# Altium PCB XBeeReceiver.PcbDoc
Units mm, origin at the board's own origin, x right, y up, seen from the top; angles counter-clockwise.
Board outline 65.5 x 54.1 mm, 4 copper layers (Top Copper, GND, PWR, Bottom Copper), stack 1.605 mm thick; 49 components, 51 nets, 211 pads, 164 vias.
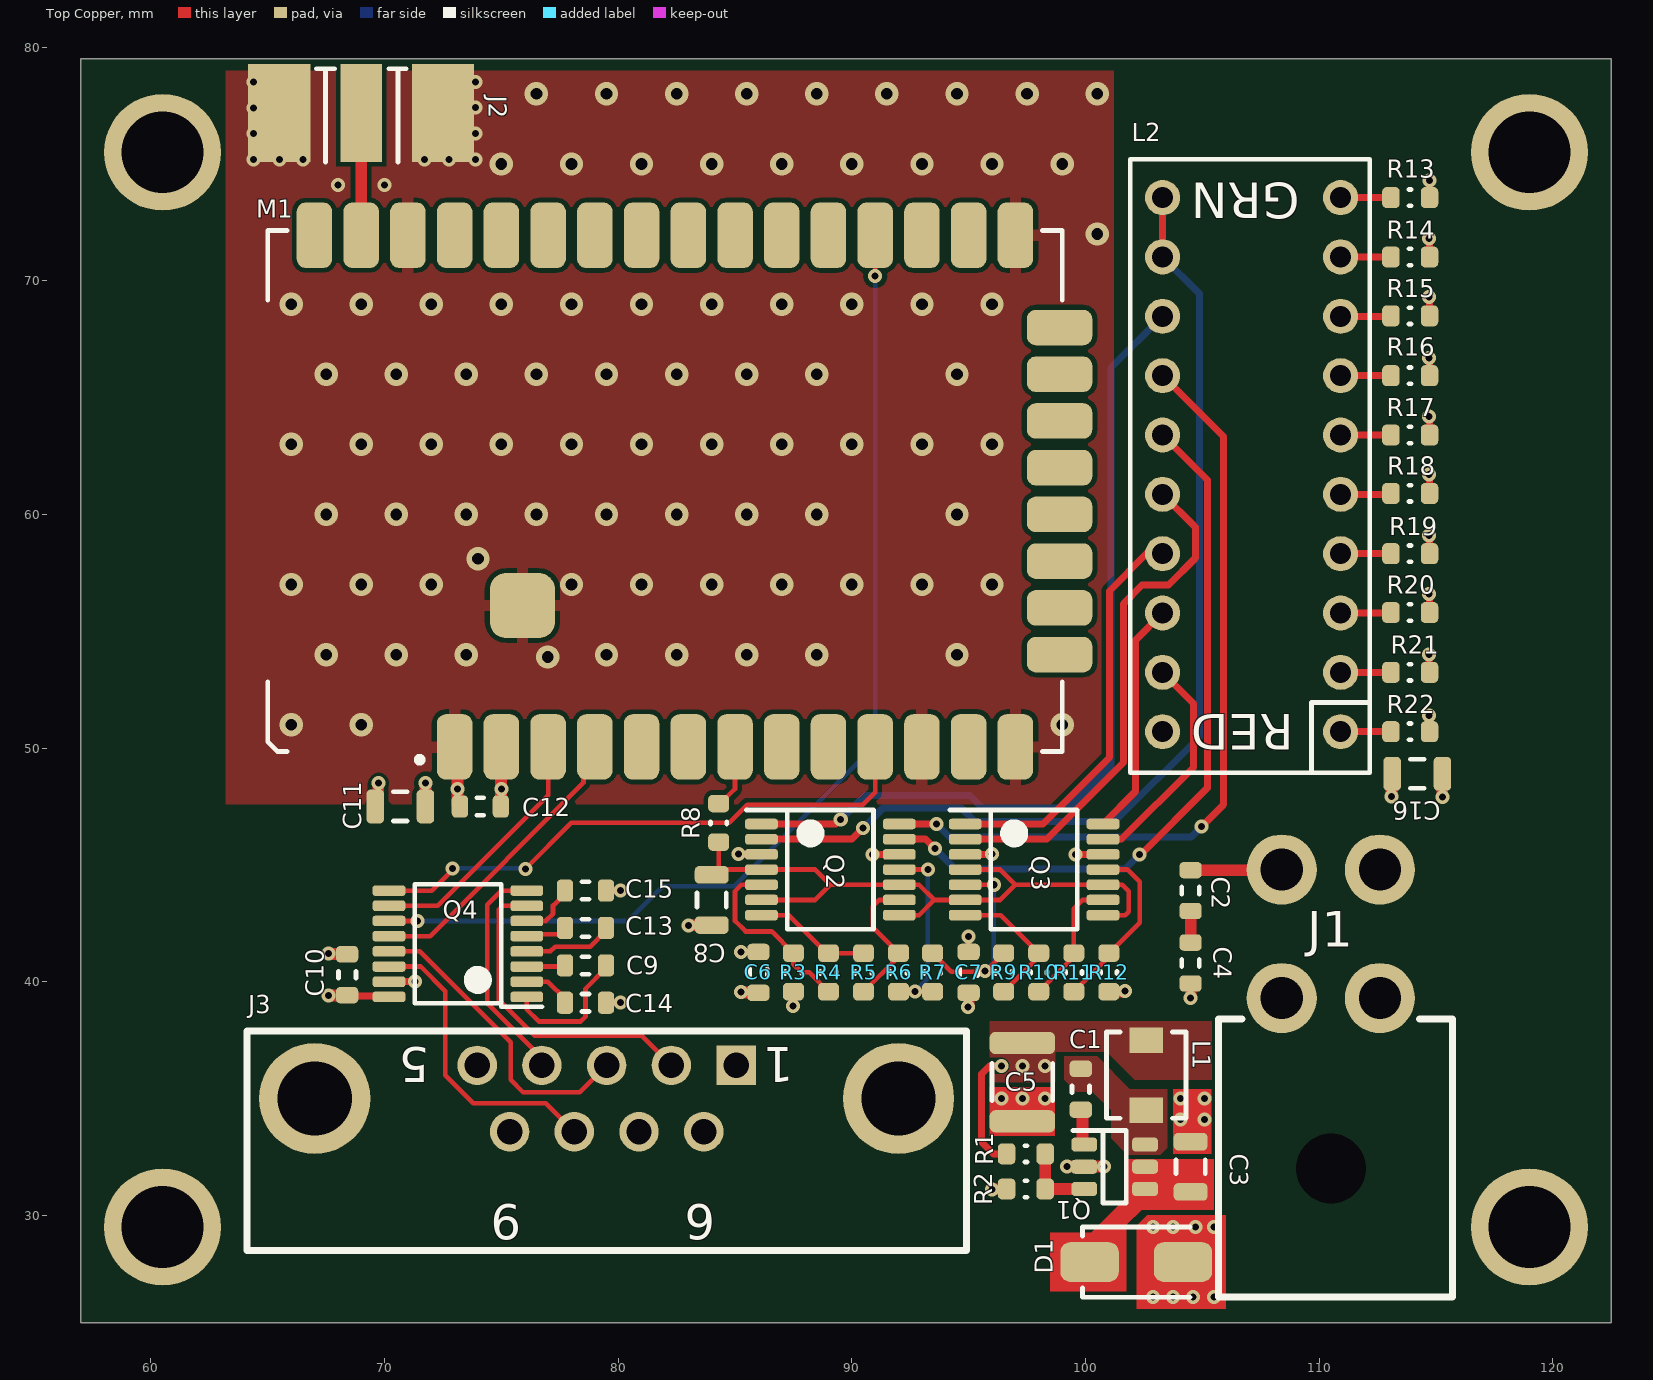
[diagram p0: Top Copper view]
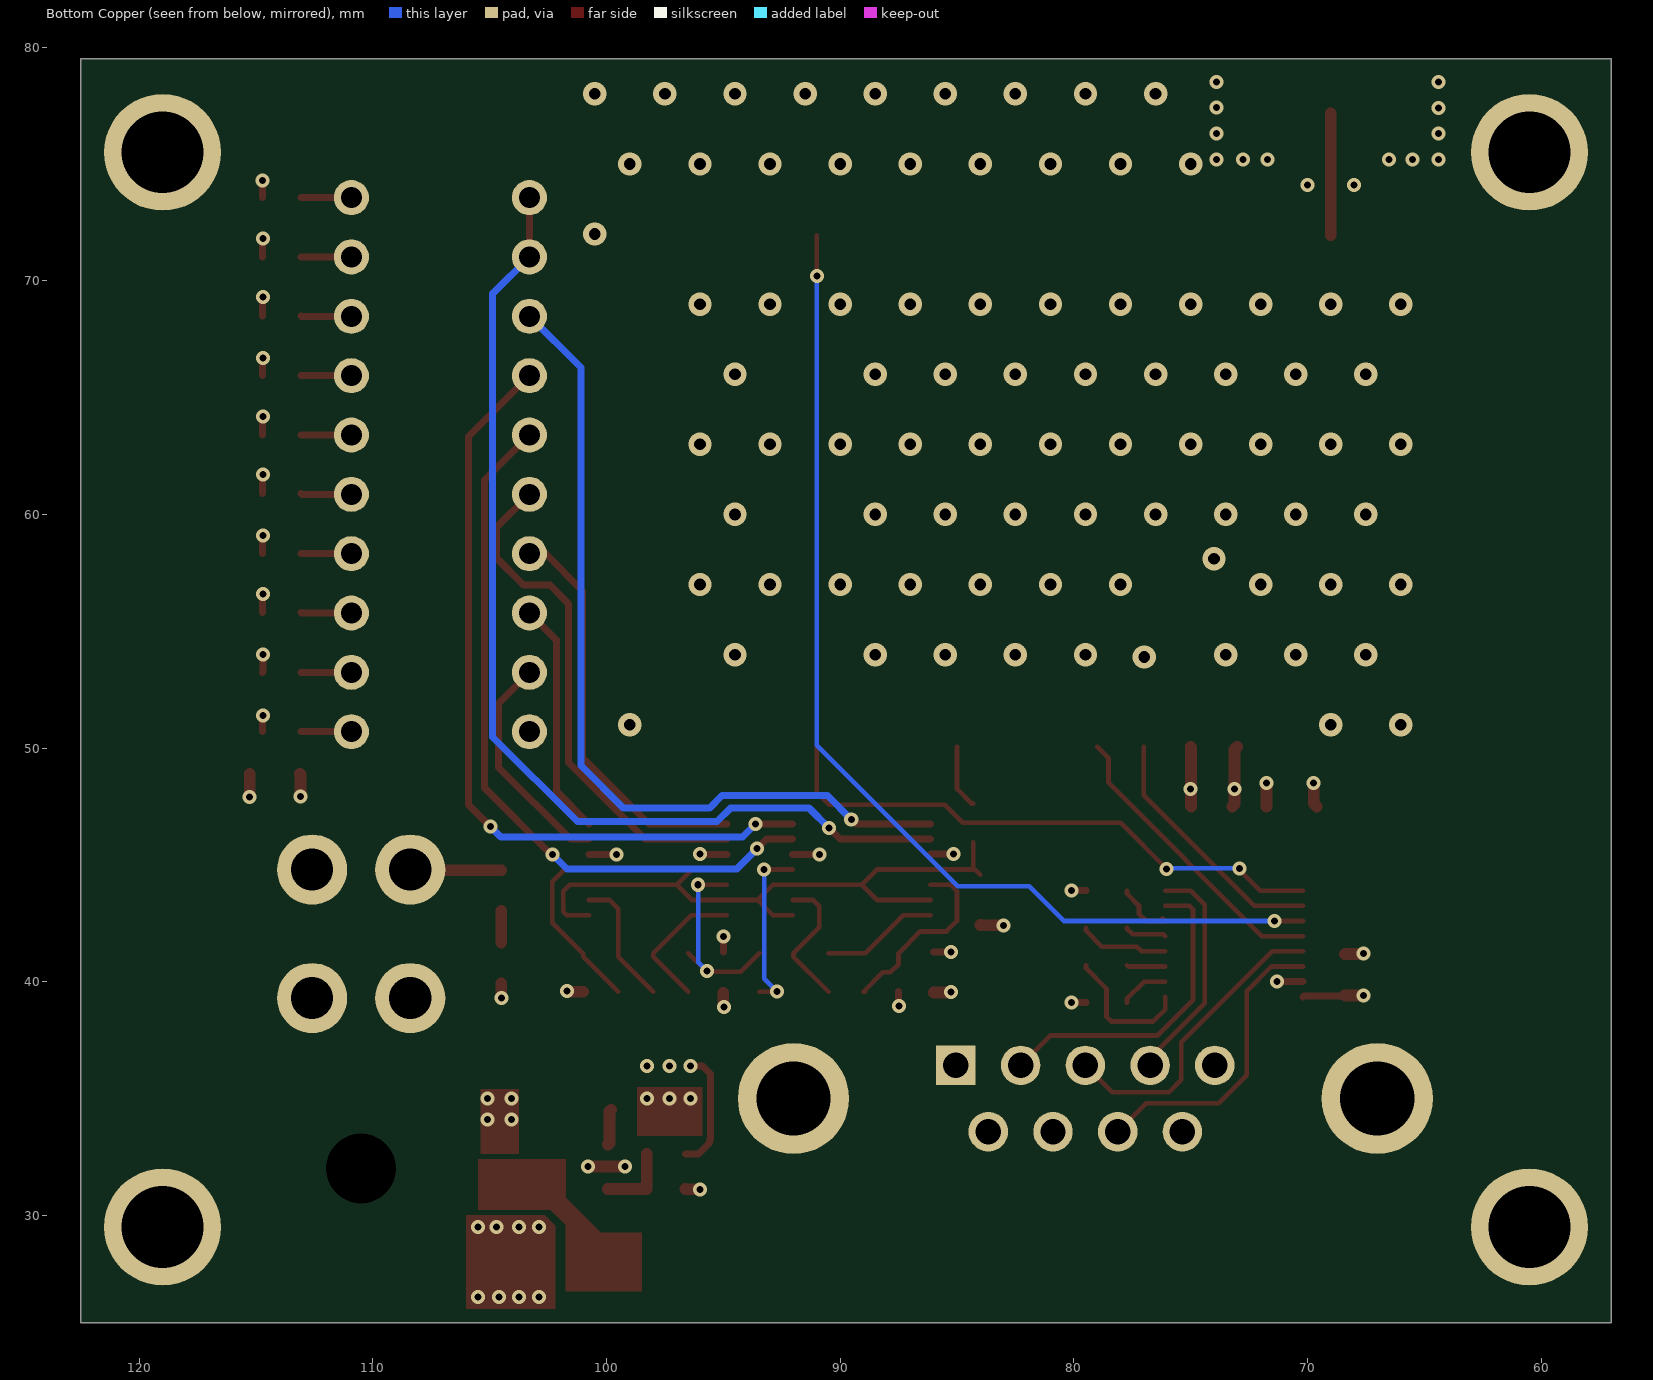
[diagram p1: Bottom Copper view, seen from below]
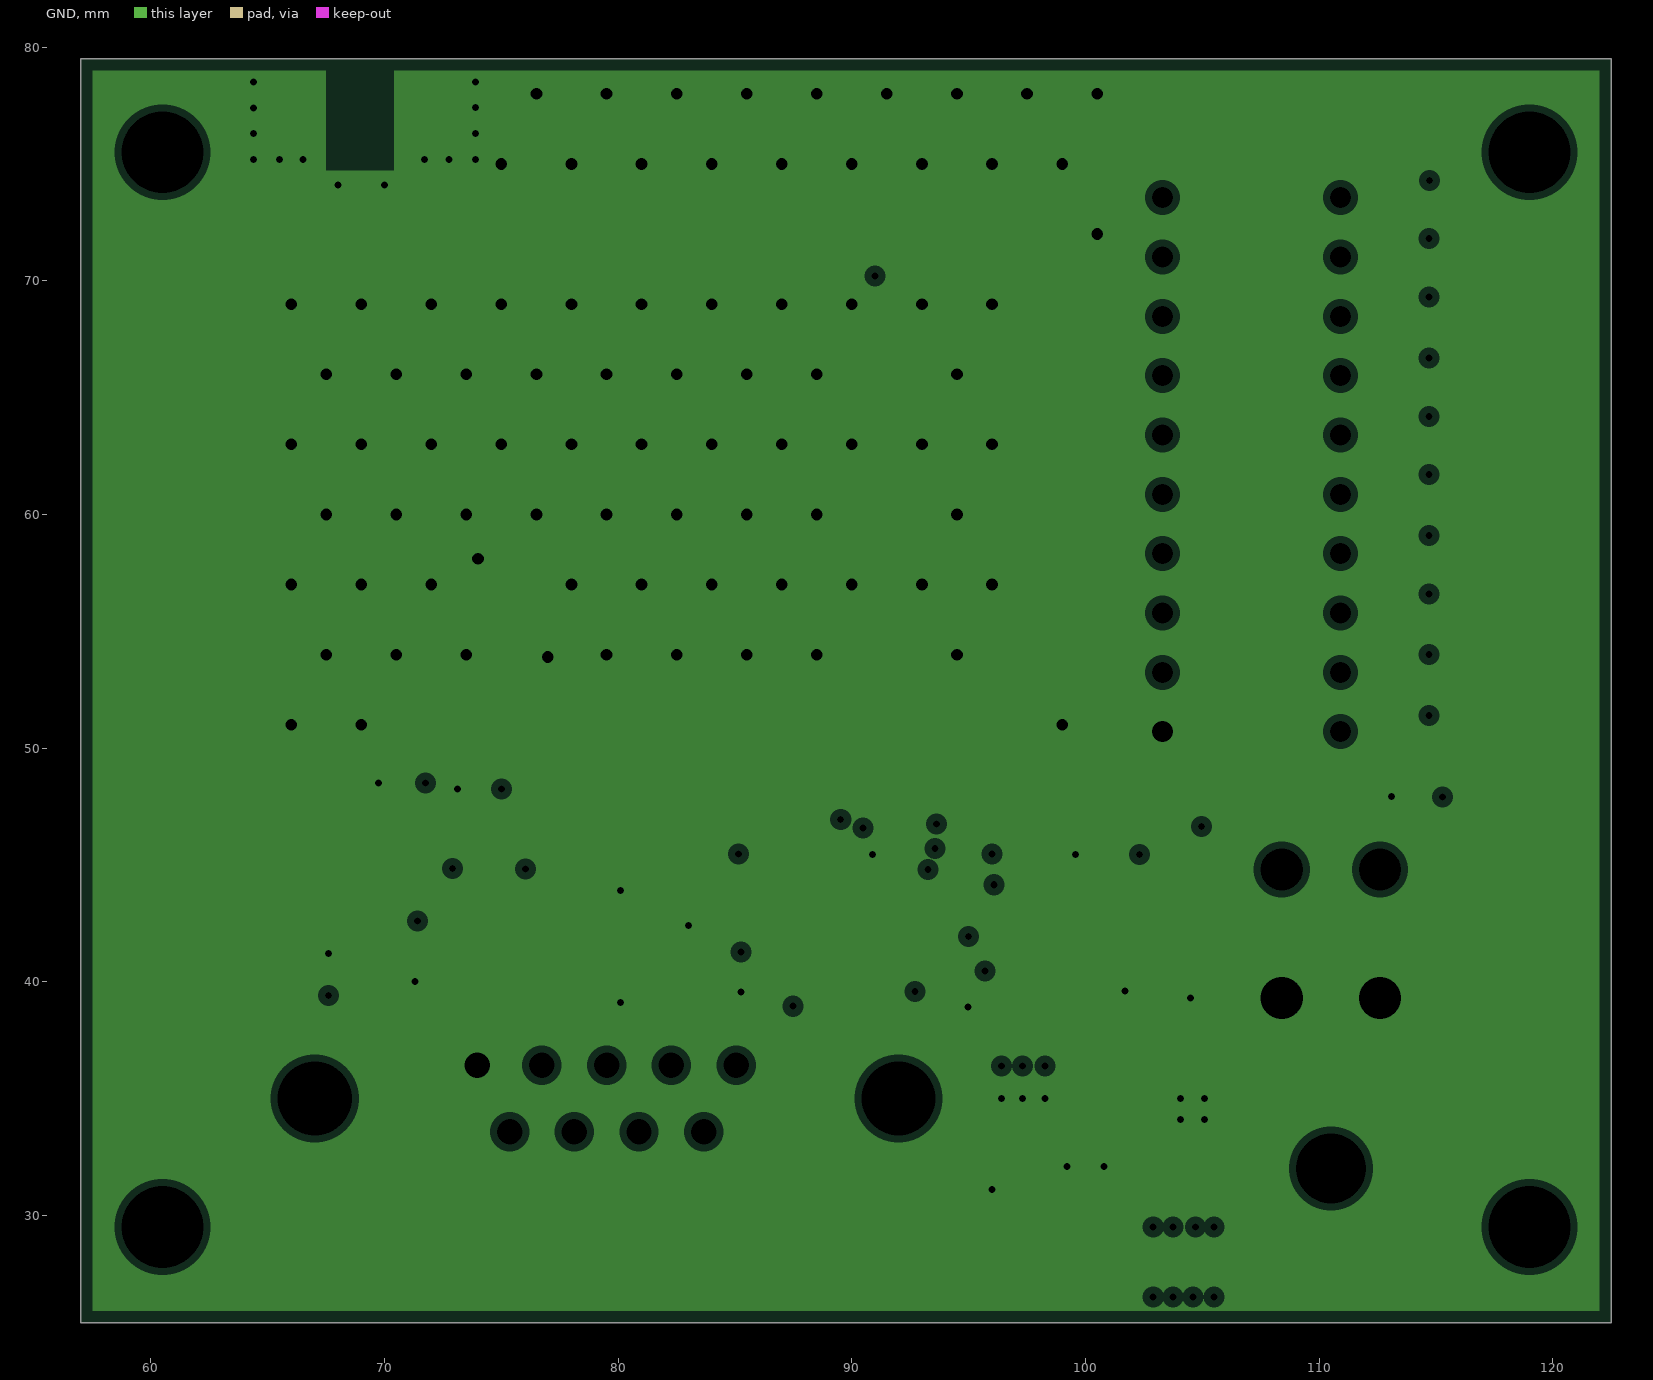
[diagram p2: GND, clearances drawn from the general rule]
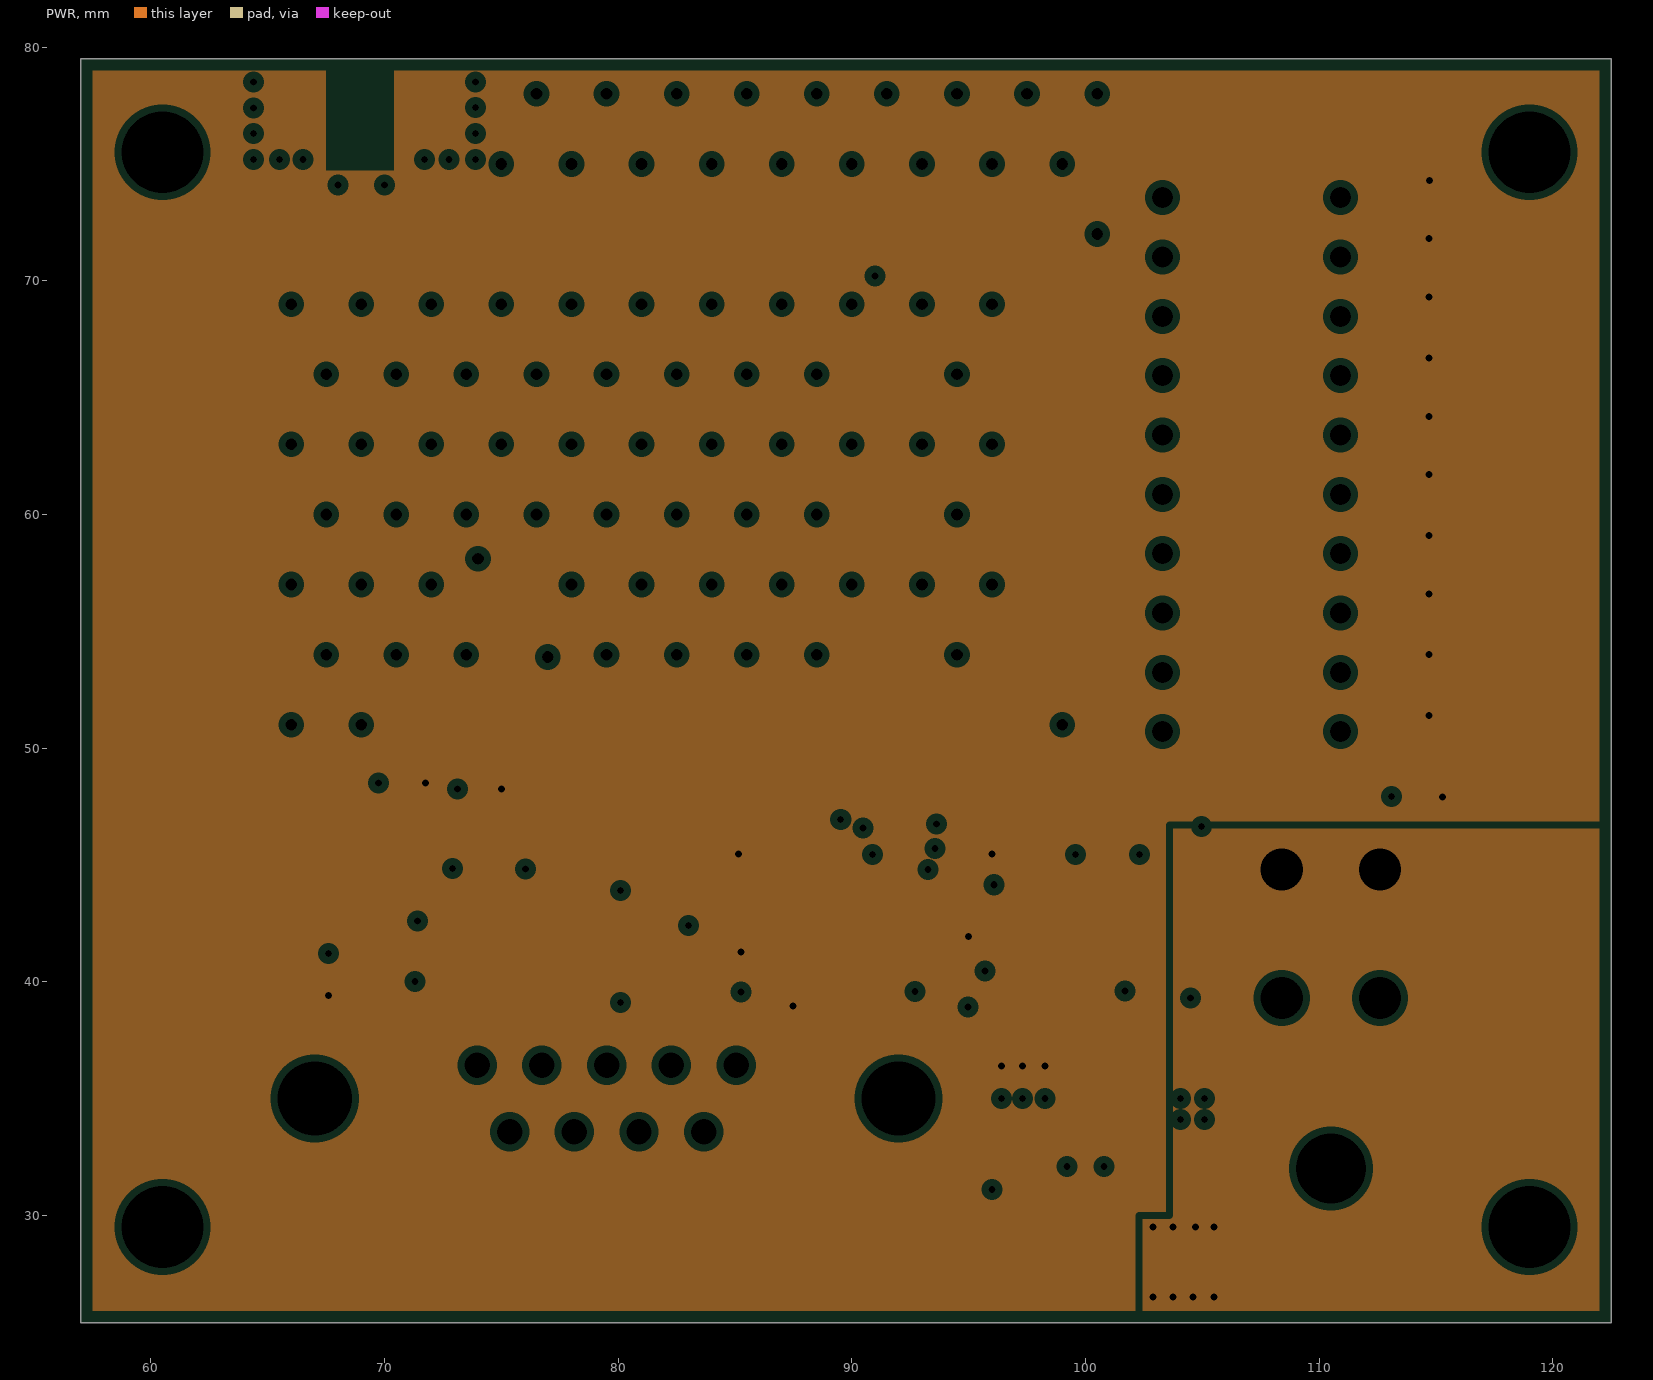
[diagram p3: PWR, clearances drawn from the general rule]
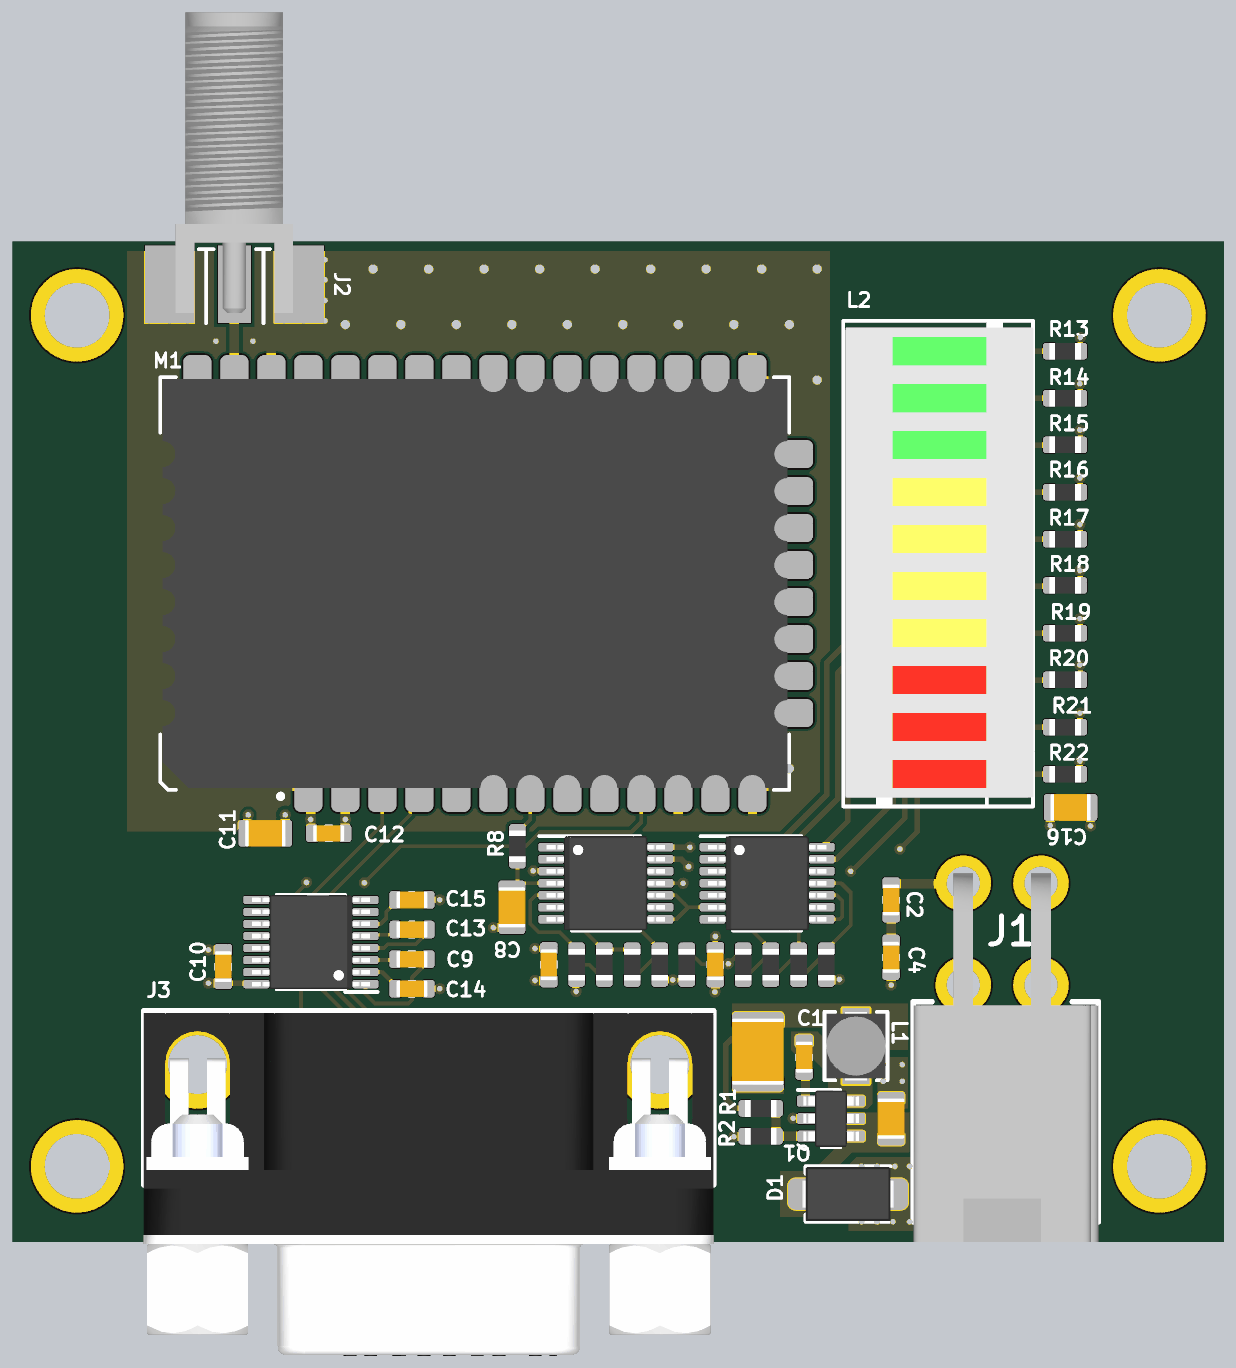
[diagram p4: 3D render of the assembled board from above, using the file's embedded part models]

## Layer stack, top to bottom
Top Mask: solder mask 0.015, Solder Resist, Dk 3.8
Top Copper: signal copper 0.035
Dielectric 1: prepreg 0.2, 7628, Dk 4.6
GND: plane copper 0.035, net GND
Core: core 1.065, FR-4, Dk 4.5
PWR: plane copper 0.035, net +3.3V
Dielectric 2: prepreg 0.2, 7628, Dk 4.6
Bottom Copper: signal copper 0.035
Bottom Mask: solder mask 0.015, Solder Resist, Dk 3.8

## Board outline
57,25.4 57,79.5 122.5,79.5 122.5,25.4

## Design rules (kind name [scope] priority, off if disabled: settings)
BoardOutlineClearance [All] p1: gap=0.2 ignorepadtopadclearanceinfootprint=FALSE except(0.4: Arc-SplitBarrior Arc-SplitContinuation Track-SplitBarrior Track-SplitContinuation SMDPad-SplitBarrior SMDPad-SplitContinuation THPad-SplitBarrior THPad-SplitContinuation Via-SplitBarrior Via-SplitContinuation Fill-SplitBarrior Fill-SplitContinuation Poly-SplitBarrior Poly-SplitContinuation Region-SplitBarrior Region-SplitContinuation Text-SplitBarrior Text-SplitContinuation)
Clearance "Clearance Bottom Layer" [OnLayer('Bottom Layer')] p1: gap=0.203 ignorepadtopadclearanceinfootprint=TRUE except(0.254: Arc-Text Track-Text SMDPad-Text THPad-Text Via-Text Fill-Text Poly-Text Region-Text Text-Text)
Clearance "Clearance Top Layer" [OnLayer('Top Layer')] p2: gap=0.203 ignorepadtopadclearanceinfootprint=TRUE except(0.254: Arc-Text Track-Text SMDPad-Text THPad-Text Via-Text Fill-Text Poly-Text Region-Text Text-Text)
Clearance [All] p3: gap=0.2 ignorepadtopadclearanceinfootprint=FALSE except(0.089: Arc-Arc Arc-Track Arc-SMDPad Track-Track Track-SMDPad SMDPad-SMDPad; 0.127: Arc-Via Track-Via SMDPad-Via THPad-Via Via-Via; 0.254: Arc-Text Track-Text SMDPad-Text THPad-Text Via-Text Fill-Text Poly-Text Region-Text Text-Text)
HoleSize [All] p1: absolutevalues=TRUE maxlimit=6.3 minlimit=0.2 maxpercent=80.000 minpercent=20.000
MinimumAnnularRing [All] p1: minimumring=0.076
MinimumSolderMaskSliver [All] p1: minsoldermaskwidth=0.051
PlaneClearance [All] p1: clearance=0.3
PlaneConnect [All] p1: planeconnectstyle=Direct reliefexpansion=0.508 reliefentries=4 reliefconductorwidth=0.254 reliefairgap=0.254
PolygonConnect PolygonConnectXbee [All vs HasFootprint('XBEESX868MOD')] p1: thpad.connectstyle=Direct thpad.reliefconductorwidth=0.254 thpad.reliefentries=4 thpad.polygonreliefangle="90 Angle" thpad.airgapwidth=0.254 smdpad.connectstyle=Relief smdpad.reliefconductorwidth=0.5 smdpad.reliefentries=4 smdpad.polygonreliefangle="90 Angle" smdpad.airgapwidth=0.2 via.connectstyle=Direct via.reliefconductorwidth=0.254 via.reliefentries=4 via.polygonreliefangle="90 Angle" via.airgapwidth=0.254
PolygonConnect PolygonConnect_1 [All] p2: connectstyle=Direct reliefconductorwidth=0.508 reliefentries=4 polygonreliefangle="90 Angle" airgapwidth=0.254
RoomDefinition U_XbeeModule [InComponentClass('U_XbeeModule')] p1: confinementstyle=ConfineIn formatcopy=TRUE lockcomponents=FALSE outline 63.7,18.9 100.7,18.9 100.7,92.1 63.7,92.1
RoomDefinition U_RSSI [InComponentClass('U_RSSI')] p2: confinementstyle=ConfineIn formatcopy=TRUE lockcomponents=FALSE outline 82.7,38.6 116.2,38.6 116.2,75.6 82.7,75.6
RoomDefinition U_PowerSupply [InComponentClass('U_PowerSupply')] p3: confinementstyle=ConfineIn formatcopy=TRUE lockcomponents=FALSE outline 95.3,25.9 105.8,25.9 105.8,45.7 95.3,45.7
RoomDefinition Main [InComponentClass('Main')] p4: confinementstyle=ConfineIn formatcopy=TRUE lockcomponents=FALSE outline 104.996,24.796 104.996,47.104 116.404,47.104 116.404,24.796
RoutingCorners [All] p1: cornerstyle=Round minsetback=2.54 maxsetback=2.54
RoutingVias [All] p1: holewidth=0.5 width=1 viastyle="Through Hole" minholewidth=0.2 minwidth=0.45 maxholewidth=1 maxwidth=2
SilkToSilkClearance [All] p1: silktosilkclearance=0.1
SilkToSolderMaskClearance [IsPad] p1: minsilkscreentomaskgap=0.1 clearancetoexposedcopper=TRUE
SolderMaskExpansion [All] p1: expansion=0.102
Width [All] p1: maxlimit=2.54 minlimit=0.089 preferedwidth=0.381
23 further rules are at their usual default settings.

## Classes and differential pairs
component class U_XbeeModule: C9 C10 C11 C12 C13 C14 C15 J2 J3 M1 Q4
component class U_RSSI: C6 C7 C8 C16 L2 Q2 Q3 R3 R4 R5 R6 R7 R8 R9 R10 R11 R12 R13 R14 R15 R16 R17 R18 R19 R20 R21 R22
component class U_PowerSupply: C1 C2 C3 C4 C5 D1 g L1 Q1 R1 R2
component class Main: J1

## Components (designator, comment, footprint, x,y, rotation, side; value= is the part's Value field where it differs from the comment)
C1 "CGA3E2X7R1H104K080AA" CAPC1608X08N 99.8,35.4 r270 top value=100nF
C2 "CGA3E2X7R1H104K080AA" CAPC1608X08N 104.5,43.9 r90 top value=100nF
C3 "CGA4J3X5R1H475K125AB" CAPC2012X14N 104.5,32.08 r270 top value=4.7uF
C4 "CGA3E2X7R1H104K080AA" CAPC1608X08N 104.5,40.8 r90 top value=100nF
C5 "CGA6P1X7R1C226M250AC" CAPC3225X28N 97.3,35.7 r90 top value=22uF
C6 "CGA3E2X7R1H104K080AA" CAPC1608X08N 86,40.4 r90 top value=100nF
C7 "CGA3E2X7R1H104K080AA" CAPC1608X08N 95,40.4 r90 top value=100nF
C8 "CGA4J3X5R1H475K125AB" CAPC2012X14N 84,43.5 r90 top value=4.7uF
C9 "CGA3E2X7R1H104K080AA" CAPC1608X08N 78.6,40.7 r180 top value=100nF
C10 "CGA3E2X7R1H104K080AA" CAPC1608X08N 68.4,40.3 r90 top value=100nF
C11 "CGA4J3X5R1H475K125AB" CAPC2012X14N 70.675,47.5 r0 top value=4.7uF
C12 "CGA3E2X7R1H104K080AA" CAPC1608X08N 74.1,47.5 r180 top value=100nF
C13 "CGA3E2X7R1H104K080AA" CAPC1608X08N 78.6,42.3 r180 top value=100nF
C14 "CGA3E2X7R1H104K080AA" CAPC1608X08N 78.6,39.1 r0 top value=100nF
C15 "CGA3E2X7R1H104K080AA" CAPC1608X08N 78.6,43.9 r0 top value=100nF
C16 "CGA4J3X5R1H475K125AB" CAPC2012X14N 114.2,48.9 r0 top value=4.7uF
D1 "B340A-13-F" DIOM4326X24N 102.175,28 r0 top value=3A/40V
J1 "3930-1041" MOLEX-3930-1041 108.4,39.3 r0 top
J2 "73251-2120" MOLEX-SMA-PCB 64.175,79.275 r0 top
J3 "DB9 - 2311765-2" DB9F-PCB-TH 79.505,25.5 r180 top
L1 "SRP3020TA-6R8M" INDP3532X20N 102.6,36 r90 top value=6.8uH
L2 "HDSP-4832" HDSP-4832 110.92,50.7 r180 top
M1 "XB8X-DMRS-001" XBEESX868MOD 82,61 r90 top
Q1 "TPS560430YFQDBVRQ1" SOT95P280X110-6N 101.25,32.08 r0 top
Q2 "TLV1704AQPWRQ1" TSOP65P640X120-14N 89.08,44.8 r0 top
Q3 "TLV1704AQPWRQ1" TSOP65P640X120-14N 97.8,44.8 r0 top
Q4 "TRS3232EQPWRQ1" TSOP65P640X120-16N 73.14,41.625 r180 top
R1 "ERJ-3EKF5102V" RESC1608X04N 97.45,32.63 r180 top value=51K
R2 "ERJ-3EKF2212V" RESC1608X04N 97.45,31.13 r0 top value=22.1K
R3 "ERJ-3EKF2212V" RESC1608X04N 87.5,40.4 r270 top value=22.1K
R4 "ERJ-3EKF2212V" RESC1608X04N 89,40.4 r270 top value=22.1K
R5 "ERJ-3EKF2212V" RESC1608X04N 90.5,40.4 r90 top value=22.1K
R6 "ERJ-3EKF2212V" RESC1608X04N 92,40.4 r90 top value=22.1K
R7 "ERJ-3EKF2212V" RESC1608X04N 93.455,40.4 r270 top value=22.1K
R8 "ERJ-3EKF5102V" RESC1608X04N 84.3,46.8 r90 top value=51K
R9 "ERJ-3EKF2212V" RESC1608X04N 96.5,40.4 r90 top value=22.1K
R10 "ERJ-3EKF2212V" RESC1608X04N 98,40.4 r90 top value=22.1K
R11 "ERJ-3EKF2212V" RESC1608X04N 99.5,40.4 r90 top value=22.1K
R12 "ERJ-3EKF2212V" RESC1608X04N 101,40.4 r90 top value=22.1K
R13 "ERJ-3EKF1000V" RESC1608X04N 113.9,73.56 r0 top value=100R
R14 "ERJ-3EKF1000V" RESC1608X04N 113.9,71.02 r0 top value=100R
R15 "ERJ-3EKF1000V" RESC1608X04N 113.9,68.5 r0 top value=100R
R16 "ERJ-3EKF1000V" RESC1608X04N 113.9,65.94 r0 top value=100R
R17 "ERJ-3EKF1000V" RESC1608X04N 113.9,63.4 r0 top value=100R
R18 "ERJ-3EKF1000V" RESC1608X04N 113.9,60.9 r0 top value=100R
R19 "ERJ-3EKF1000V" RESC1608X04N 113.9,58.32 r0 top value=100R
R20 "ERJ-3EKF1000V" RESC1608X04N 113.9,55.8 r0 top value=100R
R21 "ERJ-3EKF1000V" RESC1608X04N 113.9,53.24 r0 top value=100R
R22 "ERJ-3EKF1000V" RESC1608X04N 113.9,50.7 r0 top value=100R

## Footprints (in the part's own frame and the unit in brackets; to place one, negate y for a bottom-side part, rotate by r counter-clockwise, add the part's x,y. Pads: shape width x height; smd on the part's side, far side on the other; paste and mask are expansions set on the pad)
CAPC1608X08N [mm] "Chip Capacitor, 2-Leads, Body 1.60x0.80mm, IPC Medium Density, CGA3"
  rrect50% 0.7x0.95 smd mask+0.051: 1(-0.875,0) 2(0.875,0)
  silkscreen extent -0.15,-0.38 0.15,0.38, body extent -0.85,-0.45 0.85,0.45, height 0.8
CAPC2012X14N [mm] "Chip Capacitor, 2-Leads, Body 2.00x1.25mm, IPC Medium Density, CGA4"
  rrect50% 0.75x1.45 smd mask+0.051: 1(-1.075,0) 2(1.075,0)
  silkscreen extent -0.3,-0.63 0.3,0.63, body extent -1.1,-0.72 1.1,0.72, height 1.45
CAPC3225X28N [mm] "Chip Capacitor, 2-Leads, Body 3.20x2.50mm, IPC Medium Density, CGA6"
  rrect50% 0.95x2.8 smd mask+0.051: 1(-1.675,0) 2(1.675,0)
  silkscreen extent -0.8,-1.3 0.8,1.3, body extent -1.8,-1.4 1.8,1.4, height 2.8
DB9F-PCB-TH [mm] "Connector; D Subminiature; 9 Position; Right Angle; Pitch 1.385 mm"
  rect 1.69x1.69 hole 1.09: 1(-5.54,-10.92)
  round 1.69 hole 1.09: 2(-2.77,-10.92) 3(0,-10.92) 4(2.77,-10.92) 5(5.54,-10.92) 6(-4.155,-8.08) 7(-1.385,-8.08) 8(1.385,-8.08) 9(4.155,-8.08)
  round 4.76 hole 3.18: 10(-12.495,-9.5) 11(12.495,-9.5)
  silkscreen extent -15.4,-12.4 15.4,-3, body extent -15.41,-12.3 15.4,6.25, height 12.55
DIOM4326X24N [mm] "Molded Diode, 2-Leads, Body 4.30x2.61mm, IPC Medium Density"
  rrect50% 2.5x1.7 smd mask+0.051: 1(2,0) 2(-2,0)
  silkscreen extent -2.3,-1.5 2.3,1.5, body extent -2.52,-1.46 2.52,1.46, height 2.4
HDSP-4832 [mm] "10-Element Bar Graph Array"
  round 1.5 hole 0.9: 1(0,0) 2(0,-2.54) 3(0,-5.08) 4(0,-7.62) 5(0,-10.16) 6(0,-12.7) 7(0,-15.24) 8(0,-17.78) 9(0,-20.32) 10(0,-22.86) 11(7.62,-22.86) 12(7.62,-20.32) 13(7.62,-17.78) 14(7.62,-15.24) 15(7.62,-12.7) 16(7.62,-10.16) 17(7.62,-7.62) 18(7.62,-5.08) 19(7.62,-2.54) 20(7.62,0)
  silkscreen extent -1.25,-24.5 9,1.75, body extent -1.27,-24.51 8.89,1.65, height 6.1
INDP3532X20N [mm] "Precision Wire Wound Inductor, 2-Leads, Body 3.50x3.20mm, IPC Medium Density"
  rect 1.1x1.45 smd: 1(-1.5,0) 2(1.5,0)
  silkscreen extent -1.85,-1.7 1.85,1.7, body extent -1.85,-1.6 1.85,1.6, height 2.1
MOLEX-3930-1041 [mm] "Mini-Fit Jr. Header, Dual Row, Right-Angle"
  round 1.524 hole 3 unplated: 0(2.1,-7.3)
  round 3 hole 1.8: 1(4.2,0) 2(0,0) 3(4.2,5.5) 4(0,5.5)
  silkscreen extent -2.7,-12.8 7.3,-0.9, body extent -2.7,-13.9 7.3,6.04, height 11.4
MOLEX-SMA-PCB [mm] "50 Ohms, SMA Jack, Edge Mount"
  rect 1.78x4.19 smd mask+0.051: 1(4.825,-2.1)
  rect 2.67x4.19 smd mask+0.051: 2(1.325,-2.1) 3(8.325,-2.1)
  silkscreen extent 2.9,-4.2 6.75,-0.2, body extent 1.65,-3.66 8,12.6, height 3.8
RESC1608X04N [mm] "Chip Resistor, 2-Leads, Body 1.60x0.80mm, IPC Medium Density"
  rrect50% 0.75x0.9 smd mask+0.051: 1(-0.825,0) 2(0.825,0)
  silkscreen extent -0.05,-0.35 0.05,0.35, body extent -0.85,-0.45 0.85,0.45, height 0.45
SOT95P280X110-6N [mm] "SOT23, 6-Leads, Body 2.90x2.80mm, Pitch 0.95mm, IPC Medium Density"
  rrect50% 1.1x0.6 smd mask+0.051: 1(-1.3,0.95) 2(-1.3,0) 3(-1.3,-0.95) 4(1.3,-0.95) 5(1.3,0) 6(1.3,0.95)
  silkscreen extent -1.8,-1.55 0.5,1.55, body extent -1.5,-1.53 1.5,1.53, height 1.1
TSOP65P640X120-14N [mm] "TSOP, 14-Leads, Body 5.00x4.40mm, Pitch 0.65mm, IPC Medium Density"
  rrect50% 1.4x0.45 smd mask+0.051: 1(-2.95,1.95) 2(-2.95,1.3) 3(-2.95,0.65) 4(-2.95,0) 5(-2.95,-0.65) 6(-2.95,-1.3) 7(-2.95,-1.95) 8(2.95,-1.95) 9(2.95,-1.3) 10(2.95,-0.65) 11(2.95,0) 12(2.95,0.65) 13(2.95,1.3) 14(2.95,1.95)
  silkscreen extent -3.6,-2.55 1.85,2.55, body extent -3.2,-2.55 3.2,2.55, height 1.2
TSOP65P640X120-16N [mm] "TSOP, 16-Leads, Body 5.00x4.40mm, Pitch 0.65mm, IPC Medium Density"
  rrect50% 1.4x0.45 smd mask+0.051: 1(-2.95,2.275) 2(-2.95,1.625) 3(-2.95,0.975) 4(-2.95,0.325) 5(-2.95,-0.325) 6(-2.95,-0.975) 7(-2.95,-1.625) 8(-2.95,-2.275) 9(2.95,-2.275) 10(2.95,-1.625) 11(2.95,-0.975) 12(2.95,-0.325) 13(2.95,0.325) 14(2.95,0.975) 15(2.95,1.625) 16(2.95,2.275)
  silkscreen extent -3.6,-2.55 1.85,2.7, body extent -3.2,-2.55 3.2,2.55, height 1.2
XBEESX868MOD [mm] "LCC, 48-Pins, Body 22.10x33.78mmx3.50mm, Pitch 2.00mm, IPC Medium Density"
  rrect50% 2.8x1.52 smd: 1(-10.95,9) 2(-10.95,7) 3(-10.95,5) 4(-10.95,3) 5(-10.95,1) 6(-10.95,-1) 7(-10.95,-3) 8(-10.95,-5) 9(-10.95,-7) 10(-10.95,-9) 11(-10.95,-11) 12(-10.95,-13) 13(-10.95,-15) 22(10.95,-15) 23(10.95,-13) 24(10.95,-11) 25(10.95,-9) 26(10.95,-7) 27(10.95,-5) 28(10.95,-3) 29(10.95,-1) 30(10.95,1) 31(10.95,3) 32(10.95,5) 33(10.95,7) 34(10.95,9) 35(10.95,11) 36(10.95,13) 37(10.95,15)
  rrect50% 1.52x2.8 smd: 14(-7,-16.89) 15(-5,-16.89) 16(-3,-16.89) 17(-1,-16.89) 18(1,-16.89) 19(3,-16.89) 20(5,-16.89) 21(7,-16.89)
  rrect50% 2.79x2.79 smd: 38(-4.9,6.1)
  silkscreen extent -11.62,-17 11.15,17, body extent -11.05,-16.89 11.05,16.89, height 3.5

## Part data
C1 C2 C4 C6 C7 C9 C10 C12 C13 C14 C15: library part C0603-100nF-50V, "0603 Capacitor, 100nF", Supplier Part Number 1=810-CGA3E2X7R1H104K, Supplier 1=Mouser
C3 C8 C11 C16: library part C0805-4.7uF-50V, "0805 Capacitor, 4.7uF", Supplier Part Number 1=810-CGA4J3X5R1H475K, Supplier 1=Mouser
C5: library part C1210-22uF-16V, "1210 Capacitor, 22uF", Supplier Part Number 1=810-CGA6P1X7R1C226M, Supplier 1=Mouser
D1: library part D-SCH-3A-40V, "Schottky Diode, 3A, 40A", Supplier Part Number 1=621-B340A-F, Supplier 1=Mouser
J1: library part Molex-MiniFit-4-RA, "Molex MiniFit, Dual Row, Right Angle 3930-1041", Supplier Part Number 1=538-39-30-1041, Supplier 1=Mouser
J2: library part SMA-PCB, "RF Coaxial PCB Connector, 50 Ohms, SMA Jack, Edge Mount", PackageDocument=04-Jul-1999, Supplier Part Number 1=538-73251-2120, ComponentLink1Description="Manufacturer Link", ComponentLink1URL=http://www.amphenolrf.com/, DatasheetDocument=30-May-2003, DrillSize="Corresponds to nominal value.", LatestRevisionDate=15-Jul-2004, LatestRevisionNote="Component Replaced.", PackageReference=919-119J-51AX, PCB_Layout="Complies with manufacturer's recommendation.", Published=15-Jul-2004, Publisher="Altium Limited", Supplier 1=Mouser
J3: library part DB9F-PCB, "DB9, Female, PCB, TH", PackageDocument=O, Supplier Part Number 1=571-2311765-2, DatasheetDocument=1-Sep-1999, Gender=Receptacle, LatestRevisionDate=17-Jul-2002, LatestRevisionNote="Re-released for DXP Platform.", Orientation="Right Angle", PackageReference=788750, Positions=9, Published=15-Jun-2001, Publisher="Altium Limited", Supplier 1=Mouser
L1: library part IND-6.8uH-1.9A, "Inductor 6.8uH, 1.9A, 2.2A Isat", Supplier Part Number 1=652-SRP3020TA-6R8M, Supplier 1=Mouser
L2: "10-Element Bar Graph Array, Red Yellow Green", Supplier Part Number 1=630-HDSP-4832, Supplier 1=Mouser
M1: library part XBee-SX-868-RFPad, "868 MHz RF module", Supplier Part Number 1=888-XB8X-DMRS-001, Supplier 1=Mouser
Q1: library part TPS560430YF, "TPS560430-Q1 SIMPLE SWITCHER 4-V to 36-V, 600-mA Synchronous Buck Converter", Supplier Part Number 1=595-S560430YFQDBVRQ1, Supplier 1=Mouser
Q2 Q3: library part TLV1704Q, "TLV1704-Q1 2.2-V to 36-V, microPower Comparator, 4 channels", Supplier Part Number 1=595-TLV1704AQPWRQ1, ComponentLink1Description="Manufacturer Link", ComponentLink1URL=http://www.analog.com/, DatasheetVersion="REV. B", LatestRevisionDate=17-Jul-2002, LatestRevisionNote="Re-released for DXP Platform.", PackageDescription="Can; 8 Leads; Pin Circle Dia. 5.08 mm; Lead Dia. 0.53 mm (max)", PackageReference=H-08A, PackageVersion=1990, Published=8-Jun-2000, Publisher="Altium Limited", Supplier 1=Mouser
Q4: library part TRS3232EQ1, "3-V TO 5.5-V MULTICHANNEL RS-232 LINE DRIVER/RECEIVER WITH ±15-kV IEC ESD PROTECTION", Supplier Part Number 1=595-TRS3232EQPWRQ1, Supplier 1=Mouser
R1 R8: library part R0603R51K, "0603 Resistor", Supplier Part Number 1=667-ERJ-3EKF5102V, Supplier 1=Mouser
R2 R3 R4 R5 R6 R7 R9 R10 R11 R12: library part R0603R22.1K, "0603 Resistor", Supplier Part Number 1=667-ERJ-3EKF2212V, Supplier 1=Mouser
R13 R14 R15 R16 R17 R18 R19 R20 R21 R22: library part R0603R100, "0603 Resistor", Supplier Part Number 1=667-ERJ-3EKF1000V, Supplier 1=Mouser

## Free pads (board coordinates)
  round 5 hole 3.5: 0(60.5,29.5) 0(60.5,75.5) 0(119,29.5) 0(119,75.5)

## Via types
v1: diameter 0.6, hole 0.3, Top Copper to Bottom Copper, tented both sides, 82 vias
v2: diameter 1, hole 0.5, Top Copper to Bottom Copper, tented both sides, 80 vias
v3: diameter 1, hole 0.5, Top Copper to Bottom Copper, 2 vias

## Nets (pads, with @x,y where several pads share a name; then routed paths per layer and width w, separated by ;. In a path a pad name is that pad's centre, name@x,y a point inside that pad or via, vN(x,y) a via of type N, cw(c..) or ccw(c..) an arc to the next point about the centre after c; other vN are vias at no path point)
+3.3V: C5.2 C6.2 C7.2 C10.1 C11.2 C12.1 C16.2 L1.2 M1.2 Q2.3 Q3.3 Q4.16 R1.2 R3.2 R13.2 R14.2 R15.2 R16.2 R17.2 R18.2 R19.2 R20.2 R21.2 R22.2 | length 24.4
  Top Copper w0.3: C10.1 68.438,39.388 70.153,39.388 Q4.16 ; v1(85.15,45.475) 86.105,45.475 Q2.3 ; v1(85.25,41.275) C6.2 ; v1(87.475,38.95) 87.5,38.975 R3.2 ; Q3.3 95.975,45.45 v1(96,45.475) ; C7.2 v1(95,41.925) ; v1(96.4,36.4) 95.9,36.4 95.55,36.05 95.55,33.255 95.6,33.205 95.6,33.1 96.07,32.63 R1.2 ; v1(114.7,51.4) 114.725,51.375 R22.2 ; v1(114.7,54) 114.7,53.265 R21.2 ; v1(114.7,56.6) 114.725,56.575 R20.2 ; v1(114.7,59.1) 114.725,59.075 R19.2 ; v1(114.7,61.7) 114.725,61.675 R18.2 ; v1(114.7,64.2) 114.725,64.175 R17.2 ; v1(114.7,66.7) 114.725,66.675 R16.2 ; v1(114.7,69.3) 114.725,69.275 R15.2 ; v1(114.7,71.8) 114.725,71.775 R14.2 ; R13.2 v1(114.725,74.3)
  Top Copper w0.5: v1(67.6,39.4) 67.613,39.413 68.388,39.413 C10.1 ; C11.2 v1(71.75,48.5) ; C12.1 74.988,47.513 74.988,50.037 M1.2 ; v1(115.275,47.9) C16.2
  other v1: 97.3,36.4 98.275,36.4 75,48.25
+12V: C2.2 D1.1 J1.3 J1.4 | length 3.9
  Top Copper w0.5: C2.2 108.375,44.775 J1.4
  other v1: 102.9,26.5 103.75,26.5 104.6,26.5 105.5,26.5 102.9,29.5 103.75,29.5 104.7,29.5 105.5,29.5
CTS: M1.25 Q4.11 | length 45.8
  Top Copper w0.2: Q4.11 v1(71.4,42.6) ; v1(91,70.2) M1.25
  Bottom Copper w0.2: v1(71.4,42.6) 80.425,42.6 81.913,44.088 84.963,44.088 91,50.125 v1(91,70.2)
CTS-232: J3.8 Q4.14 | length 13
  Top Copper w0.2: Q4.14 71.55,40.65 72.6,39.6 72.6,36.004 73.804,34.8 76.9,34.8 J3.8
DIN: M1.4 Q4.12 | length 12.8
  Top Copper w0.2: Q4.12 71.95,41.95 78.513,48.513 78.513,49.563 M1.4
DOUT: M1.3 Q4.10 | length 10.8
  Top Copper w0.2: Q4.10 72.275,43.25 77,47.975 M1.3
DTR: M1.10 Q4.9 | length 24.6
  Top Copper w0.2: Q4.9 72.025,43.9 72.9,44.775 v1(72.9,44.85) ; v1(76.025,44.825) 78,46.8 84.75,46.8 85.525,47.575 90.475,47.575 91,48.1 M1.10
  Bottom Copper w0.2: v1(72.9,44.85) 76.05,44.85 v1(76.025,44.825)
DTR-232: J3.4 Q4.8 | length 9.8
  Top Copper w0.2: Q4.8 75,43.9 74.4,43.3 74.4,39.075 76.45,37.025 76.45,36.705 J3.4
GND: C3.1 C4.1 C5.1 C6.1 C7.1 C8.1 C10.2 C11.1 C12.2 C14.2 C15.2 C16.1 J1.1 J1.2 J2.2 J2.3 J3.5 L2.20 M1.1 M1.11 M1.13 M1.22 M1.35 M1.38 Q1.2 Q2.12 Q3.12 Q4.15 R2.1 R12.1 | length 16.2
  Top Copper w0.3: Q4.15 v1(71.3,40) ; C14.2 v1(80.1,39.1) ; C15.2 v1(80.1,43.9) ; v1(90.875,45.45) Q2.12 ; v1(99.575,45.45) Q3.12
  Top Copper w0.5: v1(67.6,41.2) 67.612,41.187 68.388,41.187 C10.2 ; C11.1 69.725,47.625 69.725,48.448 69.75,48.473 v1(69.75,48.5) ; M1.1 73.125,49.925 73.125,47.6 C12.2 ; v1(83,42.4) 83.013,42.413 83.988,42.413 C8.1 ; v1(85.25,39.55) 85.262,39.538 85.987,39.538 C6.1 ; v1(94.975,38.925) 95,38.95 C7.1 ; v1(96,31.1) 96.015,31.115 96.61,31.115 R2.1 ; v1(99.2,32.1) 99.21,32.09 99.94,32.09 Q1.2 99.96,32.09 100.79,32.09 v1(100.8,32.1) ; R12.1 101.675,39.575 v1(101.7,39.6) ; v1(104.5,39.3) C4.1 ; v1(113.1,47.925) 113.1,48.875 C16.1
  other v1: 104.075,34.1 105.1,34.1 96.4,35 97.3,35 98.275,35 104.075,35 105.1,35 73.125,48.25 68,74.1 70,74.1 64.4,75.2 65.5,75.2 66.5,75.2 71.7,75.2 72.75,75.2 73.9,75.2 64.4,76.3 73.9,76.3 64.4,77.4 73.9,77.415 64.4,78.5 73.9,78.5
  other v2: 66,51 69,51 99,51 67.5,54 70.5,54 73.5,54 79.5,54 82.5,54 85.5,54 88.5,54 94.5,54 66,57 69,57 72,57 78,57 81,57 84,57 87,57 90,57 93,57 96,57 67.5,60 70.5,60 73.5,60 76.5,60 79.5,60 82.5,60 85.5,60 88.5,60 94.5,60 66,63 69,63 72,63 75,63 78,63 81,63 84,63 87,63 90,63 93,63 96,63 67.5,66 70.5,66 73.5,66 76.5,66 79.5,66 82.5,66 85.5,66 88.5,66 94.5,66 66,69 69,69 72,69 75,69 78,69 81,69 84,69 87,69 90,69 93,69 96,69 100.5,72 75,75 78,75 81,75 84,75 87,75 90,75 93,75 96,75 99,75 76.5,78 79.5,78 82.5,78 85.5,78 88.5,78 91.5,78 94.5,78 97.5,78 100.5,78
  other v3: 76.991,53.9 74,58.1
NetC1_1: C1.1 L1.1 Q1.6
NetC1_2: C1.2 Q1.1 | length 1.6
  Top Copper w0.5: C1.2 99.875,34.45 99.875,33.08 99.925,33.03 Q1.1
NetC2_1: C2.1 C4.2 | length 1.4
  Top Copper w0.5: C4.2 C2.1
NetC3_2: C3.2 D1.2 Q1.4 Q1.5
NetC8_2: C8.2 Q2.4 Q2.6 Q2.8 Q2.10 Q3.4 Q3.6 Q3.8 Q3.10 R8.1 | length 29.5
  Top Copper w0.2: C8.2 84.221,44.796 84.253,44.796 C8.2@84.257,44.8 ; R8.1 84.3,44.843 C8.2@84.257,44.8 ; Q2.6 88.425,43.5 89.075,44.15 ; Q2.8 92.875,42.85 93.525,43.5 ; Q3.4 96.35,44.8 97,44.15 ; Q3.8 101.7,42.85 101.85,43 101.85,43.875 101.575,44.15 Q3.10 97,44.15 ; C8.2@84.257,44.8 Q2.4 88.425,44.8 89.075,44.15 ; 89.075,44.15 Q2.10 92.875,44.15 93.525,43.5 ; 93.525,43.5 Q3.6 96.35,43.5 97,44.15
NetC9_1: C9.1 Q4.1 | length 5.9
  Top Copper w0.2: Q4.1 76.09,38.81 76.6,38.3 78.4,38.3 78.6,38.5 78.6,39.7 79.475,40.575 C9.1
NetC9_2: C9.2 Q4.3 | length 1.7
  Top Copper w0.2: Q4.3 77.675,40.65 C9.2
NetC13_1: C13.1 Q4.4 | length 3.9
  Top Copper w0.2: Q4.4 77.1,41.3 77.3,41.5 78.8,41.5 79.475,42.175 C13.1
NetC13_2: C13.2 Q4.5 | length 1.8
  Top Copper w0.2: Q4.5 76.165,42.025 77.481,42.025 77.725,42.269 C13.2
NetC14_1: C14.1 Q4.2 | length 2.1
  Top Copper w0.2: Q4.2 76.991,40 77.725,39.266 C14.1
NetC15_1: C15.1 Q4.6 | length 2.6
  Top Copper w0.2: Q4.6@76.207,42.717 Q4.6 76.9,42.6 77.211,42.911 77.211,43.261 77.725,43.775 C15.1
NetJ2_1: J2.1 M1.36 | length 5.2
  Top Copper w0.5: M1.36 J2.1
NetL2_1: L2.1 R22.1 | length 2.2
  Top Copper w0.3: L2.1 R22.1
NetL2_2: L2.2 R21.1 | length 2.2
  Top Copper w0.3: L2.2 R21.1
NetL2_3: L2.3 R20.1 | length 2.2
  Top Copper w0.3: L2.3 113.055,55.78 R20.1
NetL2_4: L2.4 R19.1 | length 2.2
  Top Copper w0.3: L2.4 R19.1
NetL2_5: L2.5 R18.1 | length 2.2
  Top Copper w0.3: L2.5 113.035,60.86 R18.1
NetL2_6: L2.6 R17.1 | length 2.2
  Top Copper w0.3: L2.6 R17.1
NetL2_7: L2.7 R16.1 | length 2.2
  Top Copper w0.3: L2.7 R16.1
NetL2_8: L2.8 R15.1 | length 2.2
  Top Copper w0.3: L2.8 113.055,68.48 R15.1
NetL2_9: L2.9 R14.1 | length 2.2
  Top Copper w0.3: L2.9 R14.1
NetL2_10: L2.10 R13.1 | length 2.2
  Top Copper w0.3: L2.10 R13.1
NetL2_11: L2.11 L2.12 Q2.2 | length 44.8
  Top Copper w0.3: Q2.2 90,46.1 v1(90.475,46.575) ; L2.12 L2.11
  Bottom Copper w0.3: v1(90.475,46.575) 91.325,47.425 94.7,47.425 95.275,46.85 101.25,46.85 104.875,50.475 104.875,69.445 L2.12
NetL2_13: L2.13 Q2.1 | length 36.6
  Top Copper w0.3: Q2.1 89.325,46.75 v1(89.525,46.95)
  Bottom Copper w0.3: v1(89.525,46.95) 90.55,47.975 95.05,47.975 95.6,47.425 99.275,47.425 101.1,49.25 101.1,66.28 L2.13
NetL2_14: L2.14 Q2.14 | length 34.1
  Top Copper w0.3: Q2.14 v1(93.625,46.75) ; L2.14 105.9,63.34 105.9,47.575 v1(104.975,46.65)
  Bottom Copper w0.3: v1(93.625,46.75) 94.175,46.2 104.525,46.2 v1(104.975,46.65)
NetL2_15: L2.15 Q2.13 | length 31.1
  Top Copper w0.3: Q2.13 93.15,46.1 v1(93.55,45.7) ; v1(102.313,45.45) 102.375,45.45 105.225,48.3 105.225,61.475 L2.15
  Bottom Copper w0.3: v1(93.55,45.7) 94.425,44.825 101.688,44.825 v1(102.313,45.45)
NetL2_16: L2.16 Q3.2 | length 22.1
  Top Copper w0.3: Q3.2 98.345,46.1 101.625,49.38 101.625,56.175 102.425,56.975 103.55,56.975 104.7,58.125 104.7,59.46 L2.16
NetL2_17: L2.17 Q3.1 | length 17.4
  Top Copper w0.3: Q3.1 98.175,46.75 101.025,49.6 101.025,56.725 102.62,58.32 L2.17
NetL2_18: L2.18 Q3.14 | length 10.1
  Top Copper w0.3: Q3.14 102.15,48.15 102.15,54.63 L2.18
NetL2_19: L2.19 Q3.13 | length 9.8
  Top Copper w0.3: Q3.13 101.55,46.1 104.625,49.175 104.625,51.915 L2.19
NetM1_7: M1.7 R8.2 | length 2.8
  Top Copper w0.2: R8.2 84.375,47.625 85,48.25 M1.7
NetQ1_3: Q1.3 R1.1 R2.2 | length 3.2
  Top Copper w0.5: R1.1 R2.2 Q1.3
NetQ2_5: Q2.5 R3.1 R4.2 | length 8.1
  Top Copper w0.2: Q2.5 85.275,44.15 85,43.875 85,42.6 85.45,42.15 86.575,42.15 R3.1 87.5,40.75 87.85,40.4 88.175,40.4 R4.2 R4.2@88.925,39.575
NetQ2_7: Q2.7 R4.1 R5.2 | length 5
  Top Copper w0.2: Q2.7 87.3,42.85 88.925,41.225 R4.1 R5.2
NetQ2_9: Q2.9 R5.1 R6.2 | length 6
  Top Copper w0.2: R5.1 92,41.075 R6.2 90.9,42.325 90.9,43.225 91.175,43.5 Q2.9
NetQ2_11: Q2.11 R6.1 R7.2 | length 7.4
  Top Copper w0.2: Q2.11 v1(93.25,44.8) ; v1(92.7,39.575) R7.2
  Bottom Copper w0.2: v1(92.7,39.575) 93.25,40.125 v1(93.25,44.8)
NetQ3_5: Q3.5 R7.1 R9.2 | length 8.8
  Top Copper w0.2: R7.1 94.255,40.425 v1@95.7,40.425 ; Q3.5 v1(96.075,44.15) ; v1@95.712,40.438 R9.2
  Bottom Copper w0.2: v1(95.7,40.45) 96.075,40.825 v1(96.075,44.15)
NetQ3_7: Q3.7 R9.1 R10.2 | length 6.1
  Top Copper w0.2: Q3.7 96.375,42.85 R10.2 98,41.075 R9.1
NetQ3_9: Q3.9 R10.1 R11.2 | length 5.6
  Top Copper w0.2: R10.1 99.5,41.075 R11.2 99.5,43.125 99.875,43.5 Q3.9
NetQ3_11: Q3.11 R11.1 R12.2 | length 7.7
  Top Copper w0.2: R11.1 101,41.075 R12.2 101.025,41.225 102.325,42.525 102.325,44.275 101.8,44.8 Q3.11
RXD-232: J3.2 Q4.7 | length 13.7
  Top Copper w0.2: Q4.7 75.05,43.25 74.9,43.1 74.9,39.2 76.4,37.7 80.995,37.7 J3.2
TXD-232: J3.3 Q4.13 | length 13.2
  Top Copper w0.2: Q4.13 71.5,41.3 75.4,37.4 75.4,35.8 75.925,35.275 78.36,35.275 J3.3
pads on no net: J1.0 J3.1 J3.6 J3.7 J3.9 J3.10 J3.11 M1.5 M1.6 M1.8 M1.9 M1.12 M1.14 M1.15 M1.16 M1.17 M1.18 M1.19 M1.20 M1.21 M1.23 M1.24 M1.26 M1.27 M1.28 M1.29 M1.30 M1.31 M1.32 M1.33 M1.34 M1.37

## Polygon pours and split planes (outlines as drawn)
GND on Top Copper "Top Copper-GND" (solid, pour order 4): 63.2,47.6 101.2,47.6 101.2,78.99 63.2,78.99
+3.3V on Top Copper "Top Copper-+3.3V" (solid, pour order 2): 95.9,35.7 98.7,35.7 98.7,37 100.9,37 102.1,35.8 105.4,35.8 105.4,38.3 95.9,38.3
NetC1_1 on Top Copper "Top Copper-NetC1_1" (solid, pour order 0): 101.8,32.6 103.2,32.6 103.5,32.9 103.5,35.4 101.9,35.4 100.5,36.8 99.1,36.8 99.1,35.8 99.6,35.3 100.3,35.3 101.1,34.5 101.1,33.3
GND on GND (split plane): 121.99,25.91 57.51,25.91 57.51,78.99 67.5,78.99 67.5,74.725 70.4,74.725 70.4,78.99 121.99,78.99
+12V on PWR (split plane): 121.99,25.91 102.451,25.91 102.451,29.849 103.6,29.849 103.639,29.854 103.676,29.869 103.707,29.893 103.731,29.924 103.746,29.961 103.751,30 103.751,46.549 121.99,46.549
+3.3V on PWR (split plane): 121.99,46.851 103.6,46.851 103.561,46.846 103.524,46.831 103.493,46.807 103.469,46.776 103.454,46.739 103.449,46.7 103.449,30.151 102.3,30.151 102.261,30.146 102.224,30.131 102.193,30.107 102.169,30.076 102.154,30.039 102.149,30 102.149,25.91 57.51,25.91 57.51,78.99 67.5,78.99 67.5,74.725 70.4,74.725 70.4,78.99 121.99,78.99

## Other copper
Top Copper:
  rectangle net GND: 95.9,33.4 98.7,35.5
  rectangle net GND: 103.75,32.63 105.4,35.4
  region net +12V: 102.2,29.551 102.649,30 106,30 106,26 102.2,26
  region net NetC3_2: 101.75,26.75 101.75,29.601 102.399,30.25 105.5,30.25 105.5,32.4 101.75,32.4 101.75,30.75 100.25,29.25 98.5,29.25 98.5,26.75
GND (plane layer: these items are gaps in the copper):
  rectangle: 67.5,74.725 70.4,79.5
PWR (plane layer: these items are gaps in the copper):
  rectangle: 67.5,74.725 70.4,79.5
  lines w0.3: 102.3,25.4 102.3,30 103.6,30 103.6,46.7 122.5,46.7 122.5,41.9

## Silkscreen, mask and mechanical layers (free items; w line width, h text height)
Board:
  the board outline again, w1.2

## Text inside footprints (layer, text, board x,y; h text height)
J2: Courtyard Top "EDGE" at 66.275,79.575 h1.52
J3: Top Overlay "6" at 84.16,30.475 h1.5 r180; Top Overlay "9" at 75.85,30.475 h1.5 r180; Top Overlay "5" at 71.905,37.2 h1.5 r180; Top Overlay "1" at 87.505,37.2 h1.5 r180
L2: Top Overlay "GRN" at 109.17,74.2 h1.52 r180; Top Overlay "RED" at 108.92,51.45 h1.52 r180